# Altium PCB PCB.PcbDoc
Units mm, origin at the board's own origin, x right, y up, seen from the top; angles counter-clockwise.
Board outline 228 x 169 mm, 2 copper layers (Top Layer, Bottom Layer), stack 1.43 mm thick; 75 components, 61 nets, 402 pads, 19 vias.
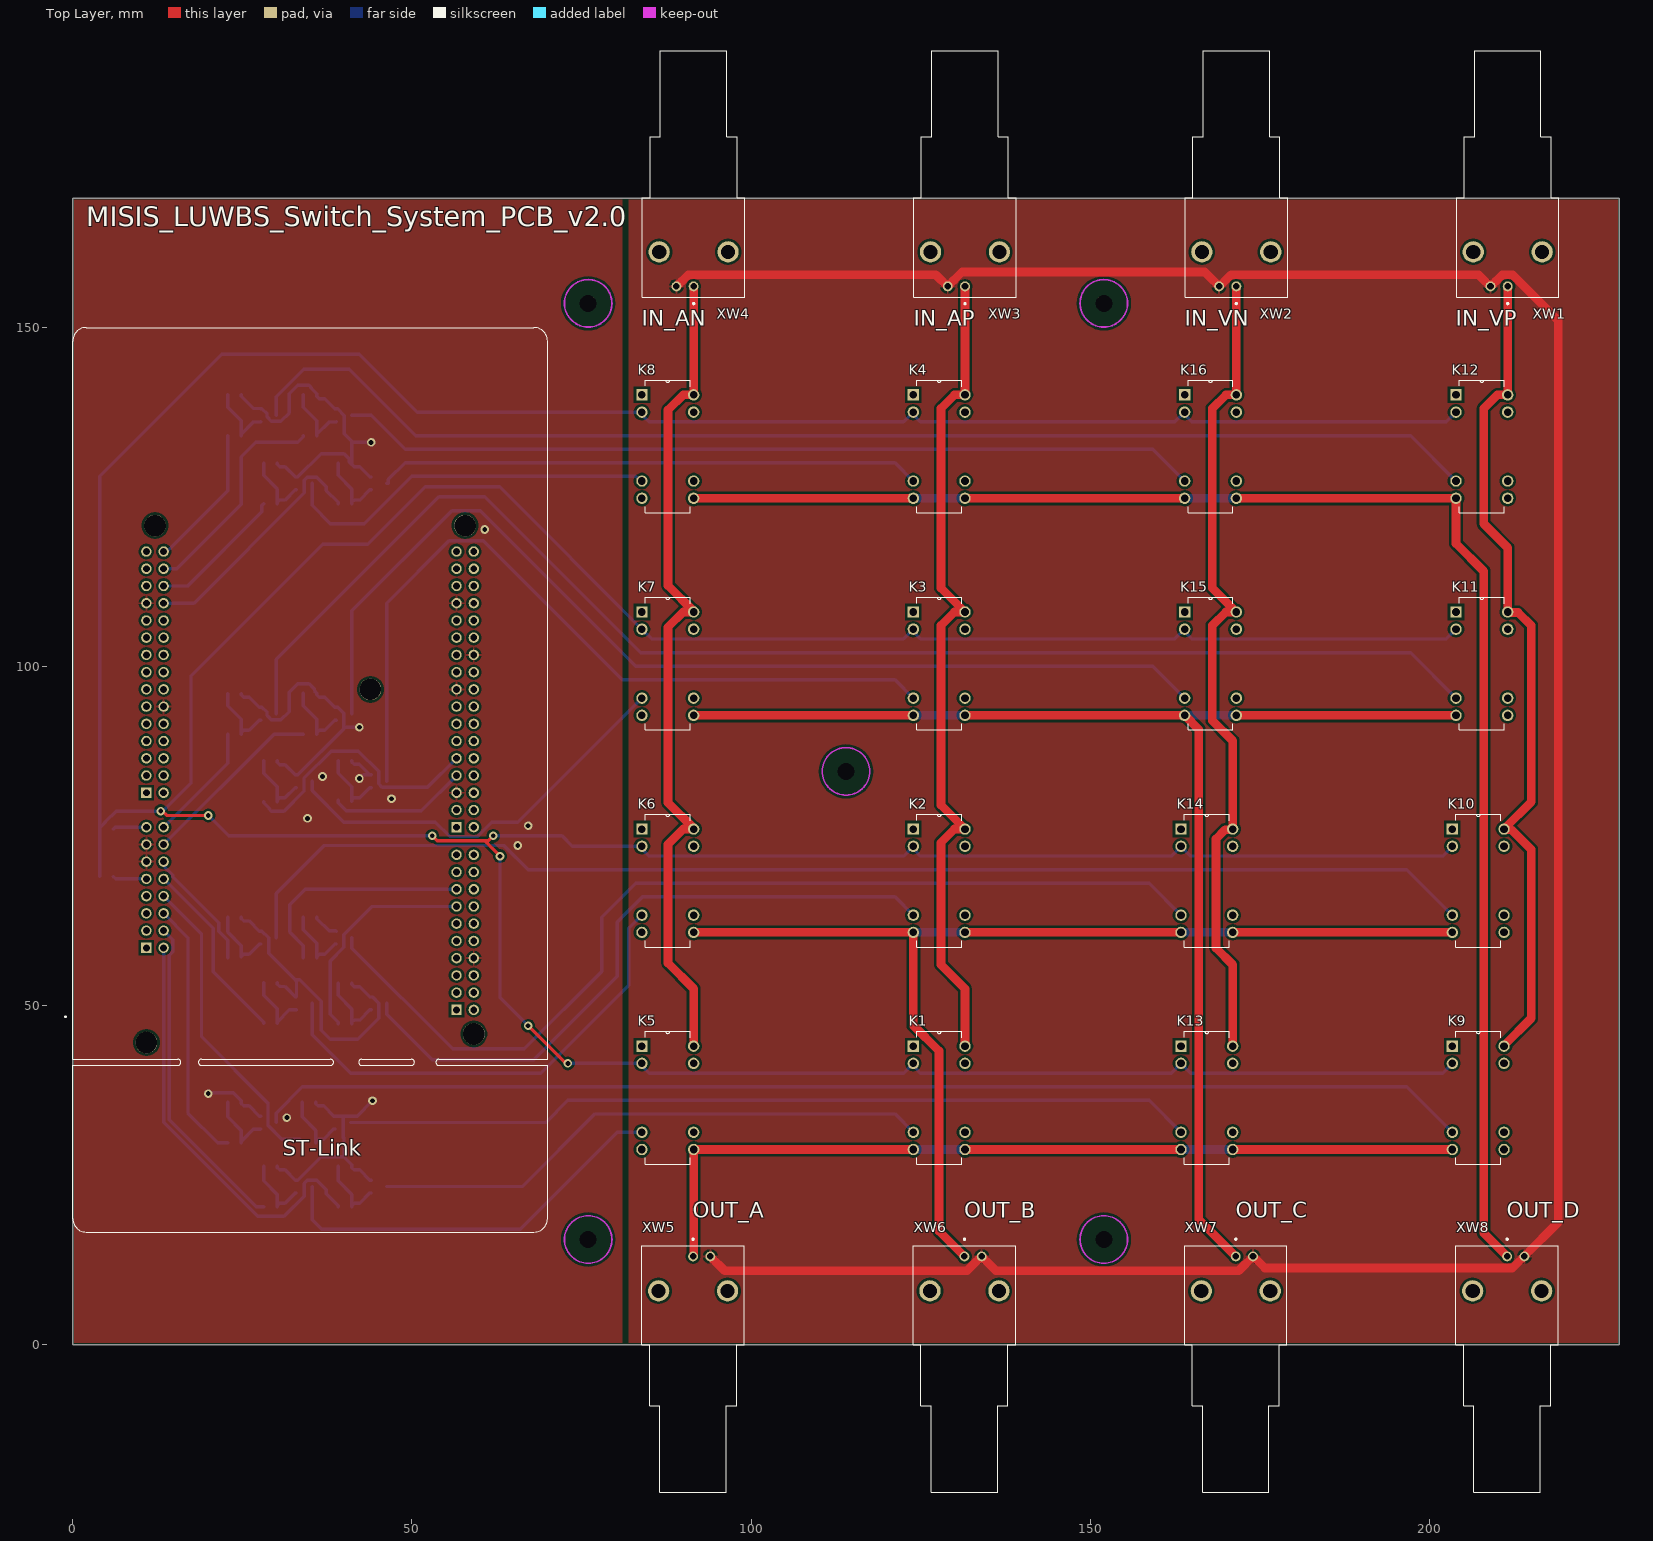
[diagram p0: Top Layer view]
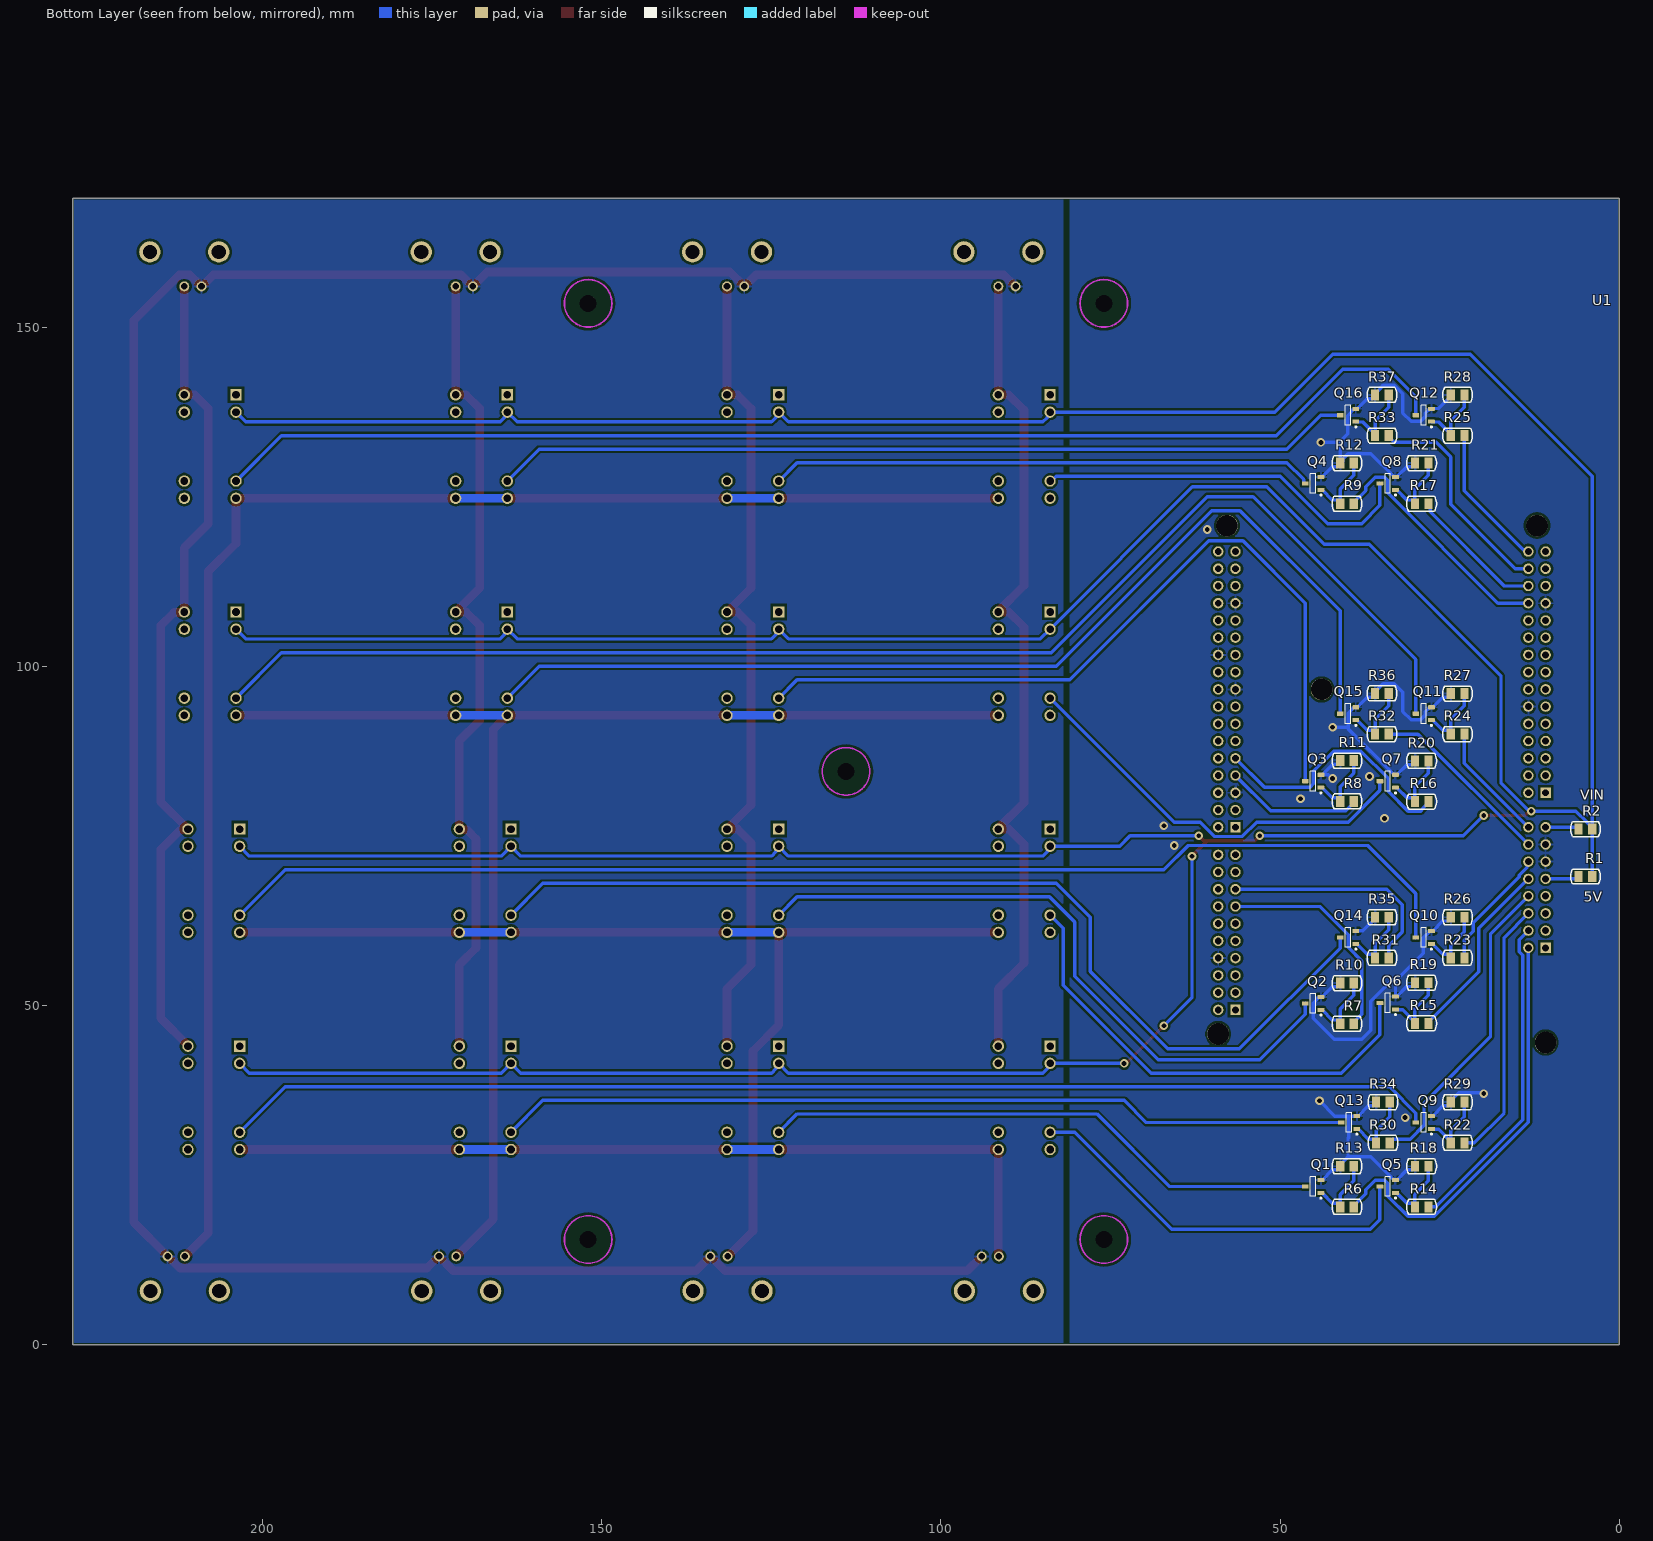
[diagram p1: Bottom Layer view, seen from below]
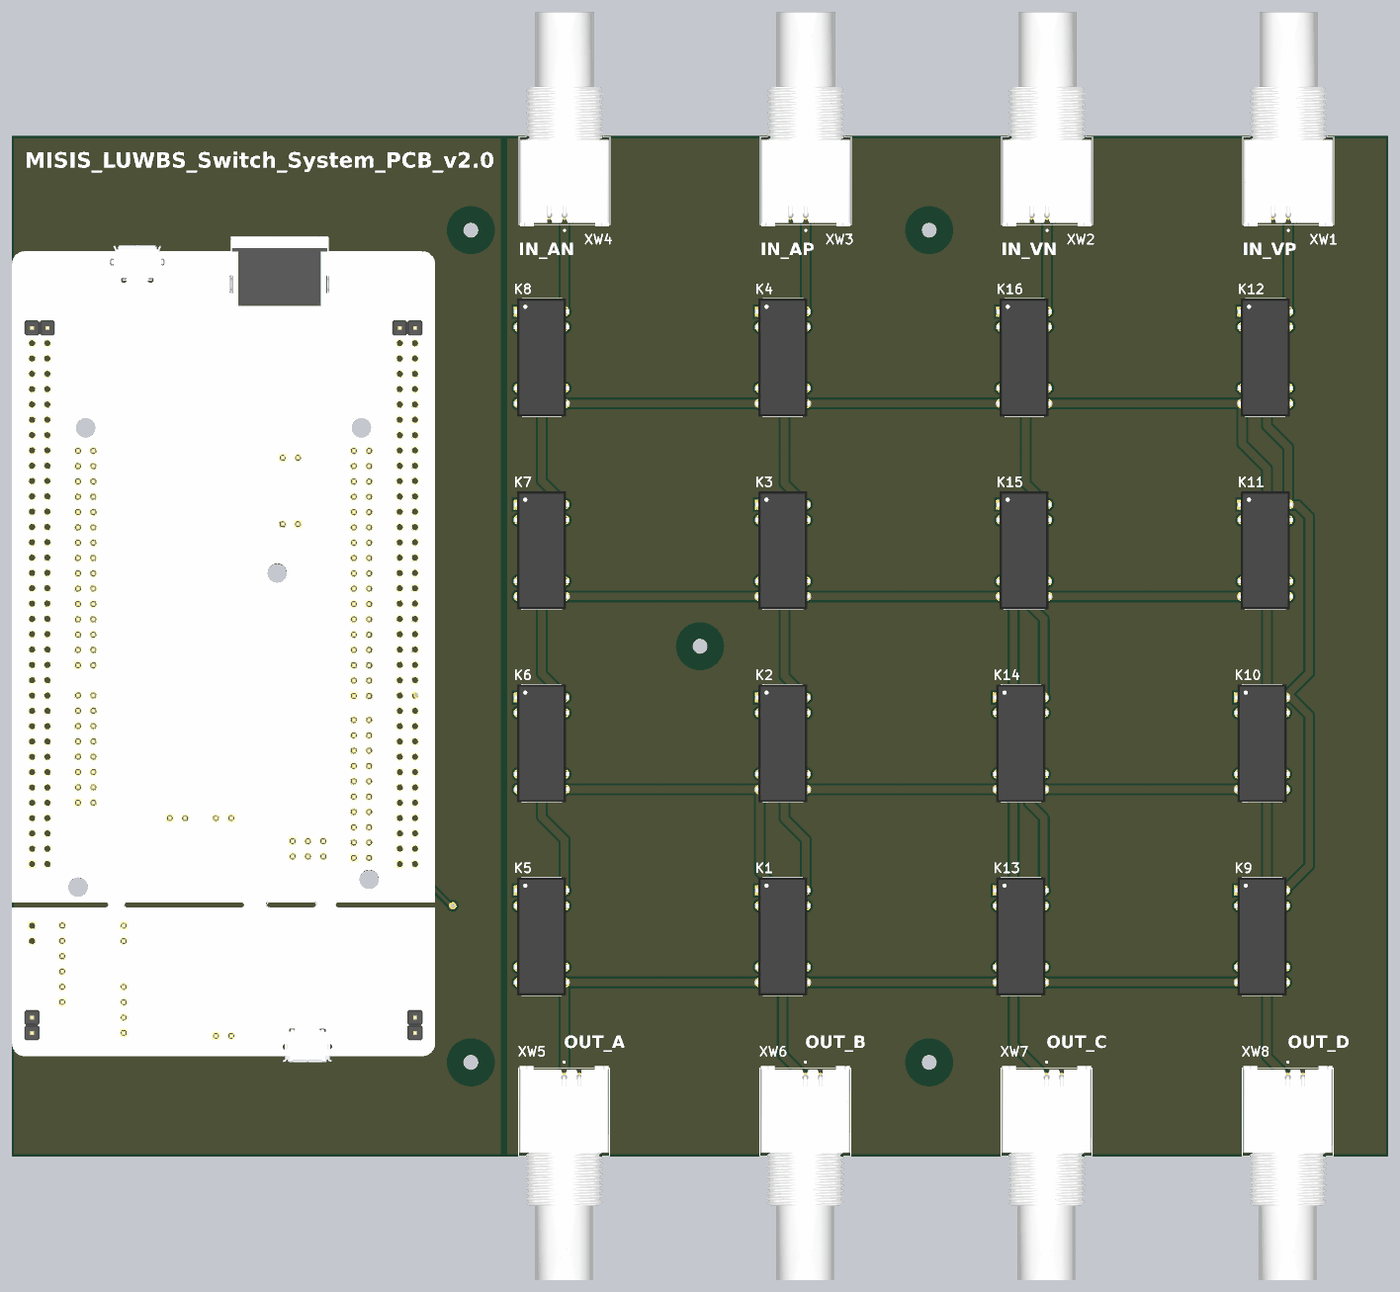
[diagram p2: 3D render of the assembled board from above, using the file's embedded part models]
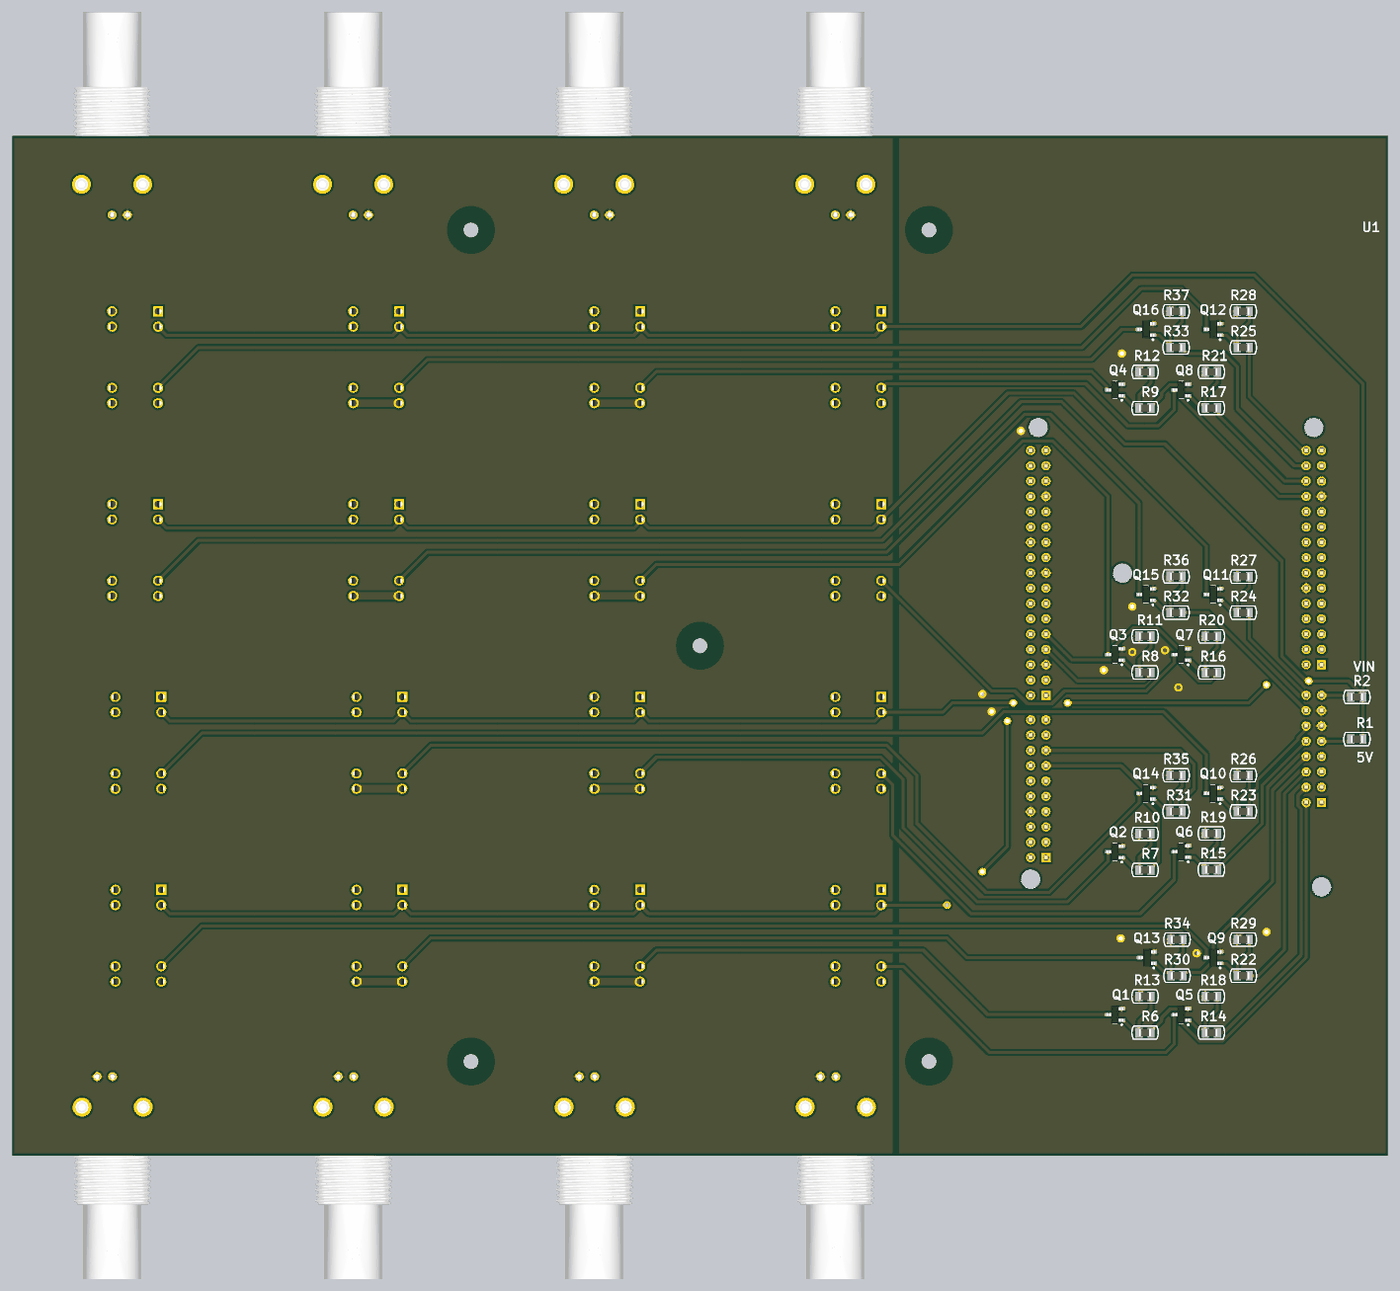
[diagram p3: 3D render of the assembled board from below, using the file's embedded part models]

## Layer stack, top to bottom
Top Solder: solder mask 0.0254, SM-001, Dk 4
Top Layer: signal copper 0.035
Dielectric 1: prepreg 0.115, FR4, Dk 4.2
Core: core 1.13, FR4, Dk 4.6
Dielectric 4: prepreg 0.115, FR4, Dk 4.2
Bottom Layer: signal copper 0.035
Bottom Solder: solder mask 0.0254, SM-001, Dk 4

## Board outline
0,0 0,169 228,169 228,0

## Design rules (kind name [scope] priority, off if disabled: settings)
AcuteAngle [All] p1: minimum=3.50000000000000E+0001 checktracksonly=FALSE
BoardOutlineClearance "BoardOutlineClearance 1" [All] p1: gap=0.25 ignorepadtopadclearanceinfootprint=FALSE except(0: Arc-SplitContinuation Track-SplitContinuation SMDPad-SplitContinuation THPad-SplitContinuation Via-SplitContinuation Fill-SplitContinuation Poly-SplitContinuation Region-SplitContinuation Text-SplitContinuation) // Milling
BoardOutlineClearance "BoardOutlineClearance 2" [All] p2: gap=0.4 ignorepadtopadclearanceinfootprint=FALSE except(0: Arc-SplitContinuation Track-SplitContinuation SMDPad-SplitContinuation THPad-SplitContinuation Via-SplitContinuation Fill-SplitContinuation Poly-SplitContinuation Region-SplitContinuation Text-SplitContinuation) // V-Cut
Clearance "Clearance 3 Oz" [All] p1: gap=0.35 ignorepadtopadclearanceinfootprint=FALSE except(0.25: Arc-Hole Track-Hole SMDPad-Hole THPad-Hole Via-Hole Fill-Hole Poly-Hole Region-Hole Text-Hole)
Clearance "Clearance 2 Oz" [All] p2: gap=0.3 ignorepadtopadclearanceinfootprint=FALSE except(0.25: Arc-Hole Track-Hole SMDPad-Hole THPad-Hole Via-Hole Fill-Hole Poly-Hole Region-Hole Text-Hole)
Clearance "Clearance-1 1 Oz" [All] p3: gap=0.2 ignorepadtopadclearanceinfootprint=FALSE except(0.25: Arc-Hole Track-Hole SMDPad-Hole THPad-Hole Via-Hole Fill-Hole Poly-Hole Region-Hole Text-Hole) // Standart
Clearance "Clearance-1 1/2 Oz" [All] p4: gap=0.125 ignorepadtopadclearanceinfootprint=FALSE except(0.2: Arc-Fill Arc-Poly Track-Fill Track-Poly SMDPad-SMDPad SMDPad-Fill SMDPad-Poly THPad-Fill THPad-Poly Via-Fill Via-Poly Fill-Fill Fill-Poly Poly-Poly Poly-Region Poly-Text; 0.25: Arc-Hole Track-Hole SMDPad-Hole THPad-Hole Via-Hole Fill-Hole Poly-Hole Region-Hole Text-Hole) // Standart
DiffPairsRouting "DiffPairsRouting 1 Oz" [All] p1: maxlimit=0.254 minlimit=0.2 mostfreqgap=0.254 toplayer_minwidth=0.2 toplayer_maxwidth=0.381 toplayer_prefwidth=0.381 bottomlayer_minwidth=0.2 bottomlayer_maxwidth=0.381 bottomlayer_prefwidth=0.381 maxuncoupledlength=12.7
DiffPairsRouting "DiffPairsRouting 1/2 Oz" [All] p2: maxlimit=0.254 minlimit=0.1 mostfreqgap=0.254 toplayer_minwidth=0.1 toplayer_maxwidth=0.381 toplayer_prefwidth=0.381 bottomlayer_minwidth=0.1 bottomlayer_maxwidth=0.381 bottomlayer_prefwidth=0.381 maxuncoupledlength=12.7
Height [All] p1: minheight=0 maxheight=35 prefheight=12.7
HoleSize "Minimum HoleSize" [IsPad] p1: absolutevalues=TRUE maxlimit=5.9 minlimit=0.6 maxpercent=80.000 minpercent=20.000
HoleSize "Minimum HoleSize VIA 1" [IsVia] p2: absolutevalues=TRUE maxlimit=5.9 minlimit=0.3 maxpercent=80.000 minpercent=20.000 // Standart
HoleSize "Minimum HoleSize VIA 2" [IsVia] p3: absolutevalues=TRUE maxlimit=5.9 minlimit=0.2 maxpercent=80.000 minpercent=20.000 // Advance
HoleToHoleClearance Hole2HoleClearance [All] p1: gap=0.25 allowstackedmicrovias=FALSE
MinimumAnnularRing "Minimum AR VIA Standart" [IsVia] p1: minimumring=0.15
MinimumAnnularRing "Minimum AR PAD Standart" [IsPAD] p2: minimumring=0.2
MinimumAnnularRing "Minimum AR VIA Advance" [IsVia] p3: minimumring=0.1
MinimumAnnularRing "Minimum AR PAD Advance" [IsPAD] p4: minimumring=0.15
MinimumSolderMaskSliver "SolderMask Bridge Standart" [All] p1: minsoldermaskwidth=0.15 // All Masks
MinimumSolderMaskSliver "SolderMask Bridge Advance" [All] p2: minsoldermaskwidth=0.1 // Mask LDI
PlaneClearance "PlaneClearance 3 Oz" [All] p1: clearance=0.35
PlaneClearance "PlaneClearance 2 Oz" [All] p2: clearance=0.3
PlaneClearance "PlaneClearance 1 Oz" [All] p3: clearance=0.2
PlaneClearance "PlaneClearance-1 1/2 Oz" [All] p4: clearance=0.2 // Standart
PlaneConnect "TermalConnect 3 Oz" [All] p1: planeconnectstyle=Relief reliefexpansion=0.2 reliefentries=4 reliefconductorwidth=0.35 reliefairgap=0.35 // Standart
PlaneConnect "TermalConnect 2 Oz" [All] p2: planeconnectstyle=Relief reliefexpansion=0.2 reliefentries=4 reliefconductorwidth=0.3 reliefairgap=0.3 // Standart
PlaneConnect "TermalConnect-1 1 Oz" [All] p3: planeconnectstyle=Relief reliefexpansion=0.2 reliefentries=4 reliefconductorwidth=0.2 reliefairgap=0.2 // Standart
PlaneConnect "TermalConnect-1 1/2 Oz" [All] p4: planeconnectstyle=Relief reliefexpansion=0.2 reliefentries=4 reliefconductorwidth=0.2 reliefairgap=0.2 // Standart
PolygonConnect "PolygonConnect 3 Oz" [All] p1: thpad.connectstyle=Relief thpad.reliefconductorwidth=0.35 thpad.reliefentries=4 thpad.polygonreliefangle="90 Angle" thpad.airgapwidth=0.35 smdpad.connectstyle=Relief smdpad.reliefconductorwidth=0.35 smdpad.reliefentries=4 smdpad.polygonreliefangle="90 Angle" smdpad.airgapwidth=0.35 via.connectstyle=Direct via.reliefconductorwidth=0.254 via.reliefentries=4 via.polygonreliefangle="90 Angle" via.airgapwidth=0.254
PolygonConnect "PolygonConnect 2 Oz" [All] p2: thpad.connectstyle=Relief thpad.reliefconductorwidth=0.3 thpad.reliefentries=4 thpad.polygonreliefangle="90 Angle" thpad.airgapwidth=0.3 smdpad.connectstyle=Relief smdpad.reliefconductorwidth=0.3 smdpad.reliefentries=4 smdpad.polygonreliefangle="90 Angle" smdpad.airgapwidth=0.3 via.connectstyle=Direct via.reliefconductorwidth=0.254 via.reliefentries=4 via.polygonreliefangle="90 Angle" via.airgapwidth=0.254
PolygonConnect "PolygonConnect-1 1 Oz" [All] p3: thpad.connectstyle=Relief thpad.reliefconductorwidth=0.2 thpad.reliefentries=4 thpad.polygonreliefangle="90 Angle" thpad.airgapwidth=0.2 smdpad.connectstyle=Relief smdpad.reliefconductorwidth=0.2 smdpad.reliefentries=4 smdpad.polygonreliefangle="90 Angle" smdpad.airgapwidth=0.2 via.connectstyle=Direct via.reliefconductorwidth=0.254 via.reliefentries=4 via.polygonreliefangle="90 Angle" via.airgapwidth=0.254 // Standart
PolygonConnect "PolygonConnect-1 1/2 Oz" [All] p4: thpad.connectstyle=Relief thpad.reliefconductorwidth=0.15 thpad.reliefentries=4 thpad.polygonreliefangle="90 Angle" thpad.airgapwidth=0.2 smdpad.connectstyle=Relief smdpad.reliefconductorwidth=0.2 smdpad.reliefentries=4 smdpad.polygonreliefangle="90 Angle" smdpad.airgapwidth=0.2 via.connectstyle=Direct via.reliefconductorwidth=0.254 via.reliefentries=4 via.polygonreliefangle="90 Angle" via.airgapwidth=0.254 // Standart
RoutingCorners [All] p1 off: cornerstyle=45-Degree minsetback=2.54 maxsetback=2.54
RoutingVias [All] p1: holewidth=0.3 width=0.6 viastyle="Through Hole" minholewidth=0.2 minwidth=0.4 maxholewidth=5.9 maxwidth=6.4
SilkToSilkClearance Silk2SilkClearance [All] p1 off: silktosilkclearance=0.15
SilkToSolderMaskClearance Silk2SolderMaskClearance [IsPad] p1 off: minsilkscreentomaskgap=0.15 clearancetoexposedcopper=TRUE
SolderMaskExpansion SolderMaskExpansion-1 [All] p1: expansion=0.05 istentingtop=FALSE // Standart
SolderMaskExpansion "SolderMaskExpansion LDI" [All] p2: expansion=0.025 istentingtop=FALSE // Advance
UnRoutedNet [All] p1: checkbadconnections=TRUE
Width "Width 3 Oz" [All] p1: maxlimit=10 minlimit=0.35 preferedwidth=0.4 checkconnectedcopper=TRUE
Width "Width 2 Oz" [All] p2: maxlimit=10 minlimit=0.3 preferedwidth=0.35 minimp=50.000000 maximp=50.000000 favimp=50.000000 checkconnectedcopper=TRUE
Width "Width 1 Oz" [All] p3: maxlimit=10 minlimit=0.15 preferedwidth=0.2 checkconnectedcopper=TRUE
Width "Width 1/2 Oz" [All] p4: maxlimit=10 minlimit=0.1 preferedwidth=0.125 checkconnectedcopper=TRUE
19 further rules are at their usual default settings.

## Classes and differential pairs
component class IN_V: K9 K10 K11 K12 K13 K14 K15 K16 Q9 Q10 Q11 Q12 Q13 Q14 Q15 Q16 R22 R23 R24 R25 R26 R27 R28 R29 R30 R31 R32 R33 R34 R35 R36 R37
component class IN_A: K1 K2 K3 K4 K5 K6 K7 K8 Q1 Q2 Q3 Q4 Q5 Q6 Q7 Q8 R6 R7 R8 R9 R10 R11 R12 R13 R14 R15 R16 R17 R18 R19 R20 R21
component class main: R1 R2 U1 XW1 XW2 XW3 XW4 XW5 XW6 XW7 XW8

## Components (designator, comment, footprint, x,y, rotation, side; value= is the part's Value field where it differs from the comment)
K1 "EDR201A0500" DIP14 131.54,28.76 r0 top locked
K2 "EDR201A0500" DIP14 131.54,60.76 r0 top locked
K3 "EDR201A0500" DIP14 131.54,92.76 r0 top locked
K4 "EDR201A0500" DIP14 131.54,124.76 r0 top locked
K5 "EDR201A0500" DIP14 91.54,28.76 r0 top locked
K6 "EDR201A0500" DIP14 91.54,60.76 r0 top locked
K7 "EDR201A0500" DIP14 91.54,92.76 r0 top locked
K8 "EDR201A0500" DIP14 91.54,124.76 r0 top locked
K9 "EDR201A0500" DIP14 211,28.76 r0 top locked
K10 "EDR201A0500" DIP14 211,60.76 r0 top locked
K11 "EDR201A0500" DIP14 211.54,92.76 r0 top locked
K12 "EDR201A0500" DIP14 211.54,124.76 r0 top locked
K13 "EDR201A0500" DIP14 171,28.76 r0 top locked
K14 "EDR201A0500" DIP14 171,60.76 r0 top locked
K15 "EDR201A0500" DIP14 171.54,92.76 r0 top locked
K16 "EDR201A0500" DIP14 171.54,124.76 r0 top locked
Q1 "IRLML2803TRPBF" SOT23-3 45.15,23.3 r0 bottom locked
Q2 "IRLML2803TRPBF" SOT23-3 45.15,50.296 r0 bottom locked
Q3 "IRLML2803TRPBF" SOT23-3 45.15,83.05 r0 bottom locked
Q4 "IRLML2803TRPBF" SOT23-3 45.15,126.95 r0 bottom locked
Q5 "IRLML2803TRPBF" SOT23-3 34.15,23.3 r0 bottom locked
Q6 "IRLML2803TRPBF" SOT23-3 34.15,50.346 r0 bottom locked
Q7 "IRLML2803TRPBF" SOT23-3 34.15,83.05 r0 bottom locked
Q8 "IRLML2803TRPBF" SOT23-3 34.15,126.95 r0 bottom locked
Q9 "IRLML2803TRPBF" SOT23-3 28.85,32.738 r0 bottom
Q10 "IRLML2803TRPBF" SOT23-3 28.85,60 r0 bottom locked
Q11 "IRLML2803TRPBF" SOT23-3 28.85,93 r0 bottom locked
Q12 "IRLML2803TRPBF" SOT23-3 28.85,137 r0 bottom locked
Q13 "IRLML2803TRPBF" SOT23-3 39.85,32.738 r0 bottom locked
Q14 "IRLML2803TRPBF" SOT23-3 40,60 r0 bottom locked
Q15 "IRLML2803TRPBF" SOT23-3 40,93 r0 bottom locked
Q16 "IRLML2803TRPBF" SOT23-3 40,137 r0 bottom locked
R1 "0 Ом" R0805 5,69 r180 bottom locked
R2 "0 Ом" R0805 5,76 r180 bottom locked
R6 "100 Ом" R0805 40.15,20.3 r180 bottom locked
R7 "100 Ом" R0805 40.15,47.296 r0 bottom locked
R8 "100 Ом" R0805 40.15,80.08 r0 bottom locked
R9 "100 Ом" R0805 40.15,123.95 r0 bottom locked
R10 "10 кОм" R0805 40.15,53.296 r180 bottom locked value="100 Ом"
R11 "10 кОм" R0805 40.15,86.08 r180 bottom locked value="100 Ом"
R12 "10 кОм" R0805 40.15,129.95 r180 bottom locked value="100 Ом"
R13 "10 кОм" R0805 40.15,26.3 r180 bottom locked value="100 Ом"
R14 "100 Ом" R0805 29.15,20.3 r180 bottom locked
R15 "100 Ом" R0805 29.15,47.346 r0 bottom locked
R16 "100 Ом" R0805 29.15,80.05 r0 bottom locked
R17 "100 Ом" R0805 29.15,123.95 r0 bottom locked
R18 "10 кОм" R0805 29.15,26.3 r180 bottom locked value="100 Ом"
R19 "10 кОм" R0805 29.15,53.346 r180 bottom locked value="100 Ом"
R20 "10 кОм" R0805 29.15,86.05 r180 bottom locked value="100 Ом"
R21 "10 кОм" R0805 29.15,129.95 r180 bottom locked value="100 Ом"
R22 "100 Ом" R0805 23.85,29.738 r180 bottom locked
R23 "100 Ом" R0805 23.85,57 r0 bottom locked
R24 "100 Ом" R0805 23.85,90 r0 bottom locked
R25 "100 Ом" R0805 23.85,134 r0 bottom locked
R26 "10 кОм" R0805 23.85,63 r180 bottom locked value="100 Ом"
R27 "10 кОм" R0805 23.85,95.97 r180 bottom locked value="100 Ом"
R28 "10 кОм" R0805 23.85,140 r180 bottom locked value="100 Ом"
R29 "10 кОм" R0805 23.85,35.738 r180 bottom locked value="100 Ом"
R30 "100 Ом" R0805 34.85,29.738 r180 bottom locked
R31 "100 Ом" R0805 35,57 r0 bottom locked
R32 "100 Ом" R0805 35,90 r0 bottom locked
R33 "100 Ом" R0805 35,134 r0 bottom locked
R34 "10 кОм" R0805 34.85,35.738 r180 bottom locked value="100 Ом"
R35 "10 кОм" R0805 35,63 r180 bottom locked value="100 Ом"
R36 "10 кОм" R0805 35,96 r180 bottom locked value="100 Ом"
R37 "10 кОм" R0805 35,140 r180 bottom locked value="100 Ом"
U1 "NUCLEO-F429ZI" MODULE_NUCLEO-F429ZI 35,83.26 r0 bottom locked
XW1 "BNC-JR" TE_227161-1 211.54,161.08 r180 top locked
XW2 "BNC-JR" TE_227161-1 171.54,161.08 r180 top locked
XW3 "BNC-JR" TE_227161-1 131.54,161.08 r180 top locked
XW4 "BNC-JR" TE_227161-1 91.54,161.08 r180 top locked
XW5 "BNC-JR" TE_227161-1 91.46,7.92 r0 top locked
XW6 "BNC-JR" TE_227161-1 131.46,7.92 r0 top locked
XW7 "BNC-JR" TE_227161-1 171.46,7.92 r0 top locked
XW8 "BNC-JR" TE_227161-1 211.46,7.92 r0 top locked

## Footprints (in the part's own frame and the unit in brackets; to place one, negate y for a bottom-side part, rotate by r counter-clockwise, add the part's x,y. Pads: shape width x height; smd on the part's side, far side on the other; paste and mask are expansions set on the pad)
DIP14 [mil] "8pin DIP14"
  rect 66x66 / inner round 66 / far side rect 66x66 hole 44: 1(-300,600)
  round 66 hole 44: 2(-300,500) 6(-300,100) 7(-300,0) 8(0,0) 9(0,100) 13(0,500) 14(0,600)
  silkscreen extent -280,-85 -20,685, body extent -333,-85 33,685, height 348
MODULE_NUCLEO-F429ZI [mm]
  rect 1.53x1.53 / inner round 1.53 / far side rect 1.53x1.53 hole 1.02: CN7_1(21.59,33.914) CN8_1(-24.13,24.77) CN9_1(-24.13,1.91) CN10_1(21.59,6.99)
  round 1.53 hole 1.02: CN7_2(24.13,33.914) CN7_3(21.59,31.374) CN7_4(24.13,31.374) CN7_5(21.59,28.834) CN7_6(24.13,28.834) CN7_7(21.59,26.294) CN7_8(24.13,26.294) CN7_9(21.59,23.754) CN7_10(24.13,23.754) CN7_11(21.59,21.214) CN7_12(24.13,21.214) CN7_13(21.59,18.674) CN7_14(24.13,18.674) CN7_15(21.59,16.134) CN7_16(24.13,16.134) CN7_17(21.59,13.594) CN7_18(24.13,13.594) CN7_19(21.59,11.054) CN7_20(24.13,11.054) CN8_2(-21.59,24.77) CN8_3(-24.13,22.23) CN8_4(-21.59,22.23) CN8_5(-24.13,19.69) CN8_6(-21.59,19.69) CN8_7(-24.13,17.15) CN8_8(-21.59,17.15) CN8_9(-24.13,14.61) CN8_10(-21.59,14.61) CN8_11(-24.13,12.07) CN8_12(-21.59,12.07) CN8_13(-24.13,9.53) CN8_14(-21.59,9.53) CN8_15(-24.13,6.99) CN8_16(-21.59,6.99) CN9_2(-21.59,1.91) CN9_3(-24.13,-0.63) CN9_4(-21.59,-0.63) CN9_5(-24.13,-3.17) CN9_6(-21.59,-3.17) CN9_7(-24.13,-5.71) CN9_8(-21.59,-5.71) CN9_9(-24.13,-8.25) CN9_10(-21.59,-8.25) CN9_11(-24.13,-10.79) CN9_12(-21.59,-10.79) CN9_13(-24.13,-13.33) CN9_14(-21.59,-13.33) CN9_15(-24.13,-15.87) CN9_16(-21.59,-15.87) CN9_17(-24.13,-18.41) CN9_18(-21.59,-18.41) CN9_19(-24.13,-20.95) CN9_20(-21.59,-20.95) CN9_21(-24.13,-23.49) CN9_22(-21.59,-23.49) CN9_23(-24.13,-26.03) CN9_24(-21.59,-26.03) CN9_25(-24.13,-28.57) CN9_26(-21.59,-28.57) CN9_27(-24.13,-31.11) CN9_28(-21.59,-31.11) CN9_29(-24.13,-33.65) CN9_30(-21.59,-33.65) CN10_2(24.13,6.99) CN10_3(21.59,4.45) CN10_4(24.13,4.45) CN10_5(21.59,1.91) CN10_6(24.13,1.91) CN10_7(21.59,-0.63) CN10_8(24.13,-0.63) CN10_9(21.59,-3.17) CN10_10(24.13,-3.17) CN10_11(21.59,-5.71) CN10_12(24.13,-5.71) CN10_13(21.59,-8.25) CN10_14(24.13,-8.25) CN10_15(21.59,-10.79) CN10_16(24.13,-10.79) CN10_17(21.59,-13.33) CN10_18(24.13,-13.33) CN10_19(21.59,-15.87) CN10_20(24.13,-15.87) CN10_21(21.59,-18.41) CN10_22(24.13,-18.41) CN10_23(21.59,-20.95) CN10_24(24.13,-20.95) CN10_25(21.59,-23.49) CN10_26(24.13,-23.49) CN10_27(21.59,-26.03) CN10_28(24.13,-26.03) CN10_29(21.59,-28.57) CN10_30(24.13,-28.57) CN10_31(21.59,-31.11) CN10_32(24.13,-31.11) CN10_33(21.59,-33.65) CN10_34(24.13,-33.65)
  round 3.2 hole 3.2 unplated: ""(-24.13,38.74) ""(-22.86,-37.46) ""(8.89,-13.33) ""(22.86,-37.46) ""(24.13,37.47)
  body extent -35,-69.27 35,67.72, height 1.46
R0805 [mm] "2012M"
  rect 1.2x1.6 smd: 1(-1,0) 2(1,0)
  silkscreen extent -2.2,-1.1 2.2,1.1, body extent -1,-0.6 1,0.6, height 0.5
SOT23-3 [mm] "SOT23, 3 pin"
  round 0.5 on Mech13: 0(0,0)
  rrect25% 1x0.6 smd: 1(-1.15,0.95) 2(-1.15,-0.95) 3(1.15,0)
  silkscreen extent -1.25,-1.45 0.38,1.81, body extent -1.4,-1.45 1.4,1.45, height 1.29
TE_227161-1 [mm]
  round 1.46 hole 0.97: 1(0,5.08) 2(2.54,5.08)
  round 3.14 hole 2.09: 3(-5.08,0) 4(5.08,0)
  silkscreen extent -7.54,-29.66 7.54,7.74, body extent -7.38,-28.58 7.38,6.98, height 16.13

## Part data
K1 K2 K3 K4 K5 K6 K7 K8 K9 K10 K11 K12 K13 K14 K15 K16: "Реле герконовое 5V / 1A,100V", Package="DIP-14 Fairchild Semiconductor", Check_prices=https://www.snapeda.com/parts/MM74HC32N/Fairchild+Imaging/view-part/?ref=eda, MF="Fairchild Semiconductor", MP=MM74HC32N, SnapEDA_Link=https://www.snapeda.com/parts/MM74HC32N/Fairchild+Imaging/view-part/?ref=snap
Q1 Q2 Q3 Q4 Q5 Q6 Q7 Q8 Q9 Q10 Q11 Q12 Q13 Q14 Q15 Q16: "N-MOSFET 30V 1.2A SOT23", Supplier Part Number 1=1173882, Supplier 1="Future Electronics"
R1 R2: library part R1_POSTOYANNYJ, "Резистор 0 Ом"
R6 R7 R8 R9 R10 R11 R12 R13 R14 R15 R16 R17 R18 R19 R20 R21 R22 R23 R24 R25 R26 R27 R28 R29 R30 R31 R32 R33 R34 R35 R36 R37: library part R1_POSTOYANNYJ, "Резистор 100 Ом"
U1: "STM32F429ZI, mbed-Enabled Development Nucleo-144 STM32F4 ARMÂ® CortexÂ®-M4 MCU 32-Bit Embedded Evaluation Board", Package=None, Check_prices=https://www.snapeda.com/parts/NUCLEO-F429ZI/STMicroelectronics/view-part/?ref=eda, MF=STMicroelectronics, MP=NUCLEO-F429ZI, SnapEDA_Link=https://www.snapeda.com/parts/NUCLEO-F429ZI/STMicroelectronics/view-part/?ref=snap
XW1 XW2 XW3 XW4 XW5 XW6 XW7 XW8: "Разъём высокочастотный RUICHI BNC-JR, гнездо на плату", Package=None, Supplier Part Number 1=900-0731713061-ND, Availability=Unavailable, MP=227161-1, Price=None, Supplier 1=DigiKey

## Free pads (board coordinates)
  round 2.3 hole 2.5 unplated: MTH1(76,15.5) MTH1(76,153.5) MTH1(114,84.5) MTH6(152,15.5) MTH6(152,153.5)

## Via types
v1: diameter 1.27, hole 0.711, Top Layer to Bottom Layer, 18 vias
v2: diameter 1.27/1.27 (per signal layer), hole 0.711, Top Layer to Bottom Layer, 1 vias

## Nets (pads, with @x,y where several pads share a name; then routed paths per layer and width w, separated by ;. In a path a pad name is that pad's centre, name@x,y a point inside that pad or via, vN(x,y) a via of type N, cw(c..) or ccw(c..) an arc to the next point about the centre after c; other vN are vias at no path point)
5V: R1.1 U1.CN8_9 | length 5
  Bottom Layer w0.5: R1.1 6.35,68.65 U1.CN8_9
BNC_A_GND: XW1.2 XW2.2 XW3.2 XW4.2 XW5.2 XW6.2 XW7.2 XW8.2 | length 403
  Top Layer w1.27: XW4.2 89.051,156 90.766,157.715 127.234,157.715 128.949,156 XW3.2 131.11,158.11 166.89,158.11 XW2.2 169.051,156 170.766,157.715 207.234,157.715 208.949,156 XW1.2 209.051,156 210.766,157.715 212.25,157.715 219,150.965 219,18.051 214,13.051 XW8.2 213.949,13 212.234,11.285 175.766,11.285 174.051,13 XW7.2 171.89,10.89 136.11,10.89 XW6.2 133.949,13 131.839,10.89 96.11,10.89 XW5.2
GND: Q1.2 Q2.2 Q3.2 Q4.2 Q5.2 Q6.2 Q7.2 Q8.2 Q9.2 Q10.2 Q11.2 Q12.2 Q13.2 Q14.2 Q15.2 Q16.2 R10.1 R11.1 R12.1 R13.1 R18.1 R19.1 R20.1 R21.1 R26.1 R27.1 R28.1 R29.1 R34.1 R35.1 R36.1 R37.1 U1.CN7_8 U1.CN8_11 U1.CN8_13 U1.CN9_12 U1.CN9_23 U1.CN10_5 U1.CN10_17 U1.CN10_22 U1.CN10_27 | length 192.6
  Bottom Layer w0.5: v1(20,37) 20.138,37.138 23.699,37.138 24.052,36.785 24.052,36.736 24.85,35.938 R29.1 24.85,35.538 25.2,35.188 26,35.188 27.5,33.688 Q9.2 ; R26.1 24.85,62.8 25.2,62.45 26,62.45 27.5,60.95 Q10.2 27.9,60.95 28.9,59.95 28.9,57.698 32.8,53.798 ; R27.1 24.85,95.77 25.2,95.42 26.03,95.42 27.5,93.95 Q11.2 27.9,93.95 28.657,93.193 28.657,92.738 29.295,92.1 30.705,92.1 31.928,93.323 31.928,96.177 33.151,97.4 34.849,97.4 35.65,96.599 35.65,96.35 R36.1 36,95.8 36.35,95.45 37.15,95.45 38.65,93.95 Q15.2 39.05,93.95 39.95,93.05 39.95,91 ; R28.1 24.85,139.8 26.65,138 27.65,138 Q12.2 27.9,137.95 28.657,137.193 28.657,136.738 29.295,136.1 30.705,136.1 31.928,137.323 31.928,140.177 33.151,141.4 34.849,141.4 35.2,141.049 35.2,141 36,140.2 R37.1 36,139.8 36.35,139.45 37.15,139.45 38.65,137.95 Q16.2 39.05,137.95 40.05,136.95 40.05,134.275 41.15,133.175 ; R18.1 30.15,26.1 30.5,25.75 31.3,25.75 32.8,24.25 Q5.2 33.2,24.25 36.65,27.7 39.999,27.7 ; R19.1 30.15,53.146 30.5,52.796 31.3,52.796 32.8,51.296 Q6.2 33,53.598 32.8,53.798 ; R20.1 30.15,85.85 30.5,85.5 31.3,85.5 32.8,84 Q7.2 33.2,84 39.95,90.75 39.95,91 ; R21.1 30.15,129.75 30.5,129.4 31.3,129.4 32.8,127.9 Q8.2 33.2,127.9 36.65,131.35 39.999,131.35 40.8,130.549 40.8,130.1 41.5,129.4 42.3,129.4 43.8,127.9 Q4.2 ; R34.1 35.85,35.538 36.2,35.188 37,35.188 38.5,33.688 Q13.2 39.95,33.688 ; R35.1 36,62.8 37.8,61 38.8,61 Q14.2 ; R10.1 41.15,53.096 41.5,52.746 42.3,52.746 43.8,51.246 Q2.2 44.2,51.246 45.1,50.346 45.1,48.1 42,45 38,45 36.65,46.35 36.65,50.601 33.453,53.798 32.8,53.798 ; R11.1 41.15,85.88 41.5,85.53 42.27,85.53 Q3.2@43.8,84 ; R12.1 41.15,133.175 ; v1(42.27,83.455) 42.373,83.455 42.919,84 Q3.2@43.8,84 ; v1(42.27,91) 39.95,91 ; Q1.2 43.8,24.25 42.3,25.75 41.5,25.75 41.15,26.1 R13.1 41.15,26.5 40.35,27.3 40.35,27.349 39.999,27.7 ; Q3.2 Q3.2@43.8,84 ; v1(44,133) 41.325,133 41.15,133.175 ; v1(44.197,35.938) 41.947,33.688 39.95,33.688 ; 39.95,33.688 39.9,33.638 39.9,30.521 39.999,30.422 39.999,27.7
  other v1: 31.587,33.463 65.62,73.571 67.144,76.482 34.612,77.565 47,80.458 36.837,83.743 60.75,120.151
IN_AN: K5.14 K6.14 K7.14 K8.14 XW4.1 | length 124.1
  Top Layer w1.27: K5.14 91.54,52.46 87.766,56.234 87.766,73.766 90,76 K6.14 91.54,76.11 87.766,79.884 87.766,105.766 90,108 K7.14 91.54,108.11 87.766,111.884 87.766,137.766 90,140 K8.14 XW4.1
IN_AP: K1.14 K2.14 K3.14 K4.14 XW3.1 | length 123.5
  Top Layer w1.27: K1.14 131.54,52.46 128,56 128,74 130,76 K2.14 128,79.54 128,106 130,108 K3.14 128,111.54 128,138 130,140 K4.14 XW3.1
IN_VN: K13.14 K14.14 K15.14 K16.14 XW2.1 | length 122.1
  Top Layer w1.27: K13.14 171,56 168.546,58.454 168.546,74.546 169.922,75.922 170.922,75.922 K14.14 171,89 168,92 168,106 170,108 K15.14 168,111.54 168,138 170,140 K16.14 XW2.1
IN_VP: K9.14 K10.14 K11.14 K12.14 XW1.1 | length 123.7
  Top Layer w1.27: K9.14 211,44.11 215,48.11 215,73 212.078,75.922 211.078,75.922 K10.14 215,80 215,106 213.078,107.922 211.618,107.922 K11.14 211.54,117.46 208,121 208,138 210,140 K12.14 XW1.1
NetK1_6: K1.6 Q1.3 | length 83.2
  Bottom Layer w0.5: Q1.3 66.3,23.3 77,34 121.22,34 K1.6
NetK2_6: K2.6 Q2.3 | length 97.7
  Bottom Layer w0.5: Q2.3 46.3,48.7 53,42 68,42 80.3,54.3 80.3,62.3 84,66 121.22,66 K2.6
NetK3_6: K3.6 Q3.3 | length 117.3
  Bottom Layer w0.5: Q3.3 46.3,109.3 55.48,118.48 60.52,118.48 81,98 121.22,98 K3.6
NetK4_6: K4.6 Q4.3 | length 80.3
  Bottom Layer w0.5: Q4.3 46.483,126.95 46.533,127 46.533,127.533 49,130 121.22,130 K4.6
NetK5_6: K5.6 Q5.3 | length 60
  Bottom Layer w0.5: Q5.3 35.3,18.4 36.7,17 66,17 80.3,31.3 K5.6
NetK6_6: K6.6 Q6.3 | length 70.2
  Bottom Layer w0.5: Q6.3 35.3,45.7 41,40 69,40 82,53 82,61.38 K6.6
NetK7_6: K7.6 Q7.3 | length 61.2
  Bottom Layer w0.5: Q7.3 35.3,81.681 39.981,77 53.481,77 55.576,74.905 59.695,74.905 61.79,77 65.62,77 K7.6
NetK8_6: K8.6 Q8.3 | length 56.2
  Bottom Layer w0.5: Q8.3 35.3,123.7 38,121 43,121 50,128 83.039,128 83.739,127.3 K8.6
NetK9_6: K9.6 Q9.3 | length 179.2
  Bottom Layer w0.5: Q9.3 30,34.137 33.863,38 196.68,38 K9.6
NetK10_6: K10.6 Q10.3 | length 187.1
  Bottom Layer w0.5: Q10.3 30,66.5 37.071,73.571 63.573,73.571 67.144,70 196.68,70 K10.6
NetK11_6: K11.6 Q11.3 | length 204.2
  Bottom Layer w0.5: Q11.3 30,101 54,125 60.75,125 83.75,102 197.22,102 K11.6
NetK12_6: K12.6 Q12.3 | length 185.1
  Bottom Layer w0.5: Q12.3 30,139.7 34.093,143.793 40.785,143.793 50.578,134 197.22,134 K12.6
NetK13_6: K13.6 Q13.3 | length 125.7
  Bottom Layer w0.5: Q13.3 69.738,32.738 73,36 158.68,36 K13.6
NetK14_6: K14.6 Q14.3 | length 146.7
  Bottom Layer w0.5: Q14.3 41.15,58.44 56,43.59 66.59,43.59 78,55 78,63 83,68 158.68,68 K14.6
NetK15_6: K15.6 Q15.3 | length 155.5
  Bottom Layer w0.5: Q15.3 41.15,108.15 55.92,122.92 60.08,122.92 83,100 159.22,100 K15.6
NetK16_6: K16.6 Q16.3 | length 126.8
  Bottom Layer w0.5: Q16.3 44,137 49,132 159.22,132 K16.6
NetQ1_1: Q1.1 R6.1 R13.2 | length 10.4
  Bottom Layer w0.5: R13.2 39.15,24.125 41.15,22.125 R6.1@41.15,20.5 ; R6.1 R6.1@41.15,20.5 ; Q1.1 43.8,22.35 42.3,20.85 41.5,20.85 R6.1@41.15,20.5
NetQ2_1: Q2.1 R7.2 R10.2 | length 10.4
  Bottom Layer w0.5: R10.2 39.15,51.471 41.15,49.471 R7.2@41.15,47.496 ; R7.2 R7.2@41.15,47.496 ; Q2.1 43.8,49.346 42.3,47.846 41.5,47.846 R7.2@41.15,47.496
NetQ3_1: Q3.1 R8.2 R11.2 | length 10.4
  Bottom Layer w0.5: R11.2 39.15,84.255 41.15,82.255 R8.2@41.15,80.28 ; R8.2 R8.2@41.15,80.28 ; Q3.1 43.8,82.1 42.33,80.63 41.5,80.63 R8.2@41.15,80.28
NetQ4_1: Q4.1 R9.2 R12.2 | length 10.4
  Bottom Layer w0.5: R12.2 39.15,128.125 41.15,126.125 R9.2@41.15,124.15 ; R9.2 R9.2@41.15,124.15 ; Q4.1 43.8,126 42.3,124.5 41.5,124.5 R9.2@41.15,124.15
NetQ5_1: Q5.1 R14.1 R18.2 | length 10.4
  Bottom Layer w0.5: R18.2 28.15,24.125 30.15,22.125 R14.1@30.15,20.5 ; R14.1 R14.1@30.15,20.5 ; Q5.1 32.8,22.35 31.3,20.85 30.5,20.85 R14.1@30.15,20.5
NetQ6_1: Q6.1 R15.2 R19.2 | length 10.4
  Bottom Layer w0.5: R19.2 28.15,51.521 30.15,49.521 R15.2@30.15,47.546 ; R15.2 R15.2@30.15,47.546 ; Q6.1 32.95,49.346 31.95,49.346 R15.2@30.15,47.546
NetQ7_1: Q7.1 R16.2 R20.2 | length 10.4
  Bottom Layer w0.5: R20.2 28.15,84.225 30.15,82.225 R16.2@30.15,80.25 ; R16.2 R16.2@30.15,80.25 ; Q7.1 32.8,82.1 31.3,80.6 30.5,80.6 R16.2@30.15,80.25
NetQ8_1: Q8.1 R17.2 R21.2 | length 10.4
  Bottom Layer w0.5: R21.2 28.15,128.125 30.15,126.125 R17.2@30.15,124.15 ; R17.2 R17.2@30.15,124.15 ; Q8.1 32.8,126 31.3,124.5 30.5,124.5 R17.2@30.15,124.15
NetQ9_1: Q9.1 R22.1 R29.2 | length 10.4
  Bottom Layer w0.5: R29.2 22.85,33.563 24.85,31.563 R22.1@24.85,29.938 ; R22.1 R22.1@24.85,29.938 ; Q9.1 27.65,31.738 26.65,31.738 R22.1@24.85,29.938
NetQ10_1: Q10.1 R23.2 R26.2 | length 10.2
  Bottom Layer w0.5: R26.2 22.85,60.825 24.85,58.825 24.85,57.2 25.2,57.55 26,57.55 27.5,59.05 Q10.1
NetQ11_1: Q11.1 R24.2 R27.2 | length 10.4
  Bottom Layer w0.5: R27.2 22.85,94.16 24.85,92.16 R24.2@24.85,90.2 ; R24.2 R24.2@24.85,90.2 ; Q11.1 27.5,92.05 26,90.55 25.2,90.55 R24.2@24.85,90.2
NetQ12_1: Q12.1 R25.2 R28.2 | length 10.4
  Bottom Layer w0.5: R28.2 22.85,138.175 24.85,136.175 R25.2@24.85,134.2 ; R25.2 R25.2@24.85,134.2 ; Q12.1 27.65,136 26.65,136 R25.2@24.85,134.2
NetQ13_1: Q13.1 R30.1 R34.2 | length 10.4
  Bottom Layer w0.5: R34.2 33.85,33.563 35.85,31.563 R30.1@35.85,29.938 ; R30.1 R30.1@35.85,29.938 ; Q13.1 38.5,31.788 37,30.288 36.2,30.288 R30.1@35.85,29.938
NetQ14_1: Q14.1 R31.2 R35.2 | length 10.4
  Bottom Layer w0.5: R35.2 34,61.175 36,59.175 R31.2@36,57.2 ; R31.2 R31.2@36,57.2 ; Q14.1 38.65,59.05 37.15,57.55 36.35,57.55 R31.2@36,57.2
NetQ15_1: Q15.1 R32.2 R36.2 | length 10.4
  Bottom Layer w0.5: R36.2 34,94.175 36,92.175 R32.2@36,90.2 ; R32.2 R32.2@36,90.2 ; Q15.1 38.65,92.05 37.15,90.55 36.35,90.55 R32.2@36,90.2
NetQ16_1: Q16.1 R33.2 R37.2 | length 10.4
  Bottom Layer w0.5: R37.2 34,138.175 36,136.175 R33.2@36,134.2 ; R33.2 R33.2@36,134.2 ; Q16.1 38.8,136 37.8,136 R33.2@36,134.2
OUT_A: K1.7 K1.8 K5.8 K9.7 K13.7 K13.8 XW5.1 | length 127.6
  Top Layer w1.27: XW5.1 91.46,13.051 91.54,13.131 K5.8 K1.7 ; K1.8 K13.7 ; K13.8 K9.7
  Bottom Layer w1.27: K1.7 K1.8 ; K13.7 K13.8
OUT_B: K2.7 K2.8 K6.8 K10.7 K14.7 K14.8 XW6.1 | length 162.7
  Top Layer w1.27: K6.8 K2.7 123.92,47.069 127.711,43.279 127.711,16.749 XW6.1 ; K2.8 K14.7 ; K14.8 K10.7
  Bottom Layer w1.27: K2.7 K2.8 ; K14.7 K14.8
OUT_C: K3.7 K3.8 K7.8 K11.7 K15.7 K15.8 XW7.1 | length 195.3
  Top Layer w1.27: K7.8 K3.7 ; K3.8 K15.7 166,90.68 166,18.46 XW7.1 ; K15.8 K11.7
  Bottom Layer w1.27: K3.7 K3.8 ; K15.7 K15.8
OUT_D: K4.7 K4.8 K8.8 K12.7 K16.7 K16.8 XW8.1 | length 227.3
  Top Layer w1.27: K8.8 K4.7 ; K4.8 K16.7 ; K16.8 K12.7 203.92,118.08 208,114 208,16.46 XW8.1
  Bottom Layer w1.27: K4.7 K4.8 ; K16.7 K16.8
PWR: K1.2 K2.2 K3.2 K4.2 K5.2 K6.2 K7.2 K8.2 K9.2 K10.2 K11.2 K12.2 K13.2 K14.2 K15.2 K16.2 R1.2 R2.2 | length 886.5
  Top Layer w0.5: v1(13,78.65) 13.208,78.65 13.858,78 v1(20,78) ; v1(53,75) 53.749,74.251 60.749,74.251 ; v2(62,75) 61.251,74.251 60.749,74.251 ; v1(63,72) 60.749,74.251 ; v1(67.144,47) 72.536,41.607 72.853,41.607 v1(73,41.46)
  Bottom Layer w0.5: R1.2 R2.2 R2.2@4,76.2 ; v1(20,78) 23,75 v1(53,75) ; v2(62,75) 72.135,75 73.675,73.46 K6.2 83.92,73.142 84.353,72.709 84.353,72.647 84.978,72.022 122.482,72.022 K2.2 123.92,73.142 124.353,72.709 124.353,72.647 124.978,72.022 161.942,72.022 K14.2 164.818,72.022 201.942,72.022 K10.2 ; v1(63,72) 63,51.144 v1(67.144,47) ; v1(73,41.46) K5.2 83.92,41.142 84.353,40.709 84.353,40.647 84.978,40.022 122.482,40.022 K1.2 123.92,41.142 124.353,40.709 124.353,40.647 124.978,40.022 161.942,40.022 K13.2 164.818,40.022 201.942,40.022 K9.2 ; K11.2 202.482,104.022 164.978,104.022 164.353,104.647 164.353,104.709 163.92,105.142 K15.2 162.482,104.022 124.978,104.022 124.353,104.647 124.353,104.709 123.92,105.142 K3.2 122.482,104.022 85.358,104.022 K7.2 62.928,126.452 51.972,126.452 43.52,118 36.87,118 17.454,98.584 17.454,82.804 13.3,78.65 v1(13,78.65) 6.401,78.65 4.798,77.046 4.798,76.998 R2.2@4,76.2 ; K12.2 202.482,136.022 164.978,136.022 164.353,136.647 164.353,136.709 163.92,137.142 K16.2 162.482,136.022 124.978,136.022 124.353,136.647 124.353,136.709 123.92,137.142 K4.2 122.482,136.022 84.978,136.022 84.353,136.647 84.353,136.709 83.92,137.142 K8.2 50.789,137.46 42.249,146 22,146 4,128 R2.2@4,76.2
R_A_AN: R14.2 U1.CN8_4 | length 47.9
  Bottom Layer w0.5: U1.CN8_4 14.775,59.665 14.775,57.925 14.26,57.41 14.26,33.156 27.093,20.323 28.127,20.323 R14.2
R_A_AP: R6.2 U1.CN8_2 | length 62.5
  Bottom Layer w0.5: U1.CN8_2 13.41,32.791 27.301,18.9 31.155,18.9 34.15,21.895 34.15,23.755 34.595,24.2 36.005,24.2 37.402,22.802 37.402,22.248 39.15,20.5 R6.2
R_A_VN: R30.2 U1.CN8_8 | length 46.4
  Bottom Layer w0.5: U1.CN8_8 19,60.52 19,45.399 28.8,35.599 28.8,32.334 30.845,30.288 33.5,30.288 33.85,29.938 R30.2
R_A_VP: R22.2 U1.CN8_6 | length 38.6
  Bottom Layer w0.5: U1.CN8_6 17,59.98 17,34.137 21.399,29.738 R22.2
R_B_AN: R15.1 U1.CN8_10 | length 27.4
  Bottom Layer w0.5: U1.CN8_10 20.704,61.356 20.704,54.992 28.15,47.546 R15.1
R_B_AP: R7.1 U1.CN7_13 | length 32.8
  Bottom Layer w0.5: R7.1 39.15,47.496 37.95,48.696 37.95,56.545 39.95,58.545 39.95,60.405 44.131,64.586 U1.CN7_13
R_B_VN: R31.1 U1.CN7_15 | length 34.2
  Bottom Layer w0.5: R31.1 34,58.825 32,60.825 32,64.85 34.276,67.126 U1.CN7_15
R_B_VP: R23.1 U1.CN8_12 | length 18.1
  Bottom Layer w0.5: U1.CN8_12 13.607,70.993 13.607,70.371 13.963,70.015 13.975,70.015 14.775,69.215 14.775,68.942 21.554,62.163 21.554,60.919 22.85,59.623 R23.1
R_C_AN: R16.1 U1.CN10_9 | length 39
  Bottom Layer w0.5: R16.1 28.15,79.85 28.948,79.052 28.948,79.004 29.301,78.65 31.155,78.65 34.1,81.595 34.1,83.455 38.125,87.48 42.125,87.48 45.1,84.505 45.1,82.645 45.595,82.15 52.31,82.15 U1.CN10_9
R_C_AP: R8.1 U1.CN10_7 | length 20.5
  Bottom Layer w0.5: R8.1@39.15,80.28 R8.1 39.15,79.88 39.948,79.082 39.948,79.034 40.301,78.68 51.38,78.68 U1.CN10_7
R_C_VN: R32.1 U1.CN8_14 | length 27.3
  Bottom Layer w0.5: U1.CN8_14 29.68,90 R32.1
R_C_VP: R24.1 U1.CN8_16 | length 17.6
  Bottom Layer w0.5: U1.CN8_16 22.85,85.71 R24.1
R_D_AN: R17.1 U1.CN9_26 | length 20.3
  Bottom Layer w0.5: U1.CN9_26 16.98,111.83 27.895,122.745 27.895,123.695 R17.1
R_D_AP: R9.1 U1.CN9_24 | length 36.6
  Bottom Layer w0.5: U1.CN9_24 17.895,109.29 34.15,125.545 34.15,127.405 34.595,127.85 36.005,127.85 37.402,126.452 37.402,125.898 39.15,124.15 R9.1
R_D_VN: R33.1 U1.CN9_28 | length 32.9
  Bottom Layer w0.5: U1.CN9_28 15.37,114.37 24.85,123.85 24.85,130.85 27,133 33.2,133 34,133.8 R33.1
R_D_VP: R25.1 U1.CN9_30 | length 21.3
  Bottom Layer w0.5: U1.CN9_30 13.607,117.107 14.107,117.107 22.85,125.85 R25.1
VIN: R2.1 U1.CN8_15 | length 5
  Bottom Layer w0.5: R2.1 6.27,76.27 U1.CN8_15
pads on no net: K1.1 K1.9 K1.13 K2.1 K2.9 K2.13 K3.1 K3.9 K3.13 K4.1 K4.9 K4.13 K5.1 K5.7 K5.9 K5.13 K6.1 K6.7 K6.9 K6.13 K7.1 K7.7 K7.9 K7.13 K8.1 K8.7 K8.9 K8.13 K9.1 K9.8 K9.9 K9.13 K10.1 K10.8 K10.9 K10.13 K11.1 K11.8 K11.9 K11.13 K12.1 K12.8 K12.9 K12.13 K13.1 K13.9 K13.13 K14.1 K14.9 K14.13 K15.1 K15.9 K15.13 K16.1 K16.9 K16.13 Q1.0 Q2.0 Q3.0 Q4.0 Q5.0 Q6.0 Q7.0 Q8.0 Q9.0 Q10.0 Q11.0 Q12.0 Q13.0 Q14.0 Q15.0 Q16.0 U1. U1.CN7_1 U1.CN7_2 U1.CN7_3 U1.CN7_4 U1.CN7_5 U1.CN7_6 U1.CN7_7 U1.CN7_9 U1.CN7_10 U1.CN7_11 U1.CN7_12 U1.CN7_14 U1.CN7_16 U1.CN7_17 U1.CN7_18 U1.CN7_19 U1.CN7_20 U1.CN8_1 U1.CN8_3 U1.CN8_5 U1.CN8_7 U1.CN9_1 U1.CN9_2 U1.CN9_3 U1.CN9_4 U1.CN9_5 U1.CN9_6 U1.CN9_7 U1.CN9_8 U1.CN9_9 U1.CN9_10 U1.CN9_11 U1.CN9_13 U1.CN9_14 U1.CN9_15 U1.CN9_16 U1.CN9_17 U1.CN9_18 U1.CN9_19 U1.CN9_20 U1.CN9_21 U1.CN9_22 U1.CN9_25 U1.CN9_27 U1.CN9_29 U1.CN10_1 U1.CN10_2 U1.CN10_3 U1.CN10_4 U1.CN10_6 U1.CN10_8 U1.CN10_10 U1.CN10_11 U1.CN10_12 U1.CN10_13 U1.CN10_14 U1.CN10_15 U1.CN10_16 U1.CN10_18 U1.CN10_19 U1.CN10_20 U1.CN10_21 U1.CN10_23 U1.CN10_24 U1.CN10_25 U1.CN10_26 U1.CN10_28 U1.CN10_29 U1.CN10_30 U1.CN10_31 U1.CN10_32 U1.CN10_33 U1.CN10_34 XW1.3 XW1.4 XW2.3 XW2.4 XW3.3 XW3.4 XW4.3 XW4.4 XW5.3 XW5.4 XW6.3 XW6.4 XW7.3 XW7.4 XW8.3 XW8.4

## Polygon pours and split planes (outlines as drawn)
BNC_A_GND on Bottom Layer "A_GND_BOT" (solid, remove dead copper, pour order 3): 82,169 228,169 228,0 82,0
GND on Bottom Layer "D_GND_BOT" (solid, remove dead copper, pour order 0): 0,169 81,169 81,0 0,0
BNC_A_GND on Top Layer "A_GND_TOP" (solid, remove dead copper, pour order 2): 82,169 228,169 228,0 82,0
GND on Top Layer "D_GND_TOP" (solid, remove dead copper, pour order 1): 0,169 81,169 81,0 0,0

## Keep-outs
Keep-Out Layer:
  circle w0.25: c76,153.5 r3.5
  circle w0.25: c152,153.5 r3.5
  circle w0.25: c114,84.5 r3.5
  circle w0.25: c152,15.5 r3.5
  circle w0.25: c76,15.5 r3.5

## Silkscreen, mask and mechanical layers (free items; w line width, h text height)
Top Overlay:
  text "MISIS_LUWBS_Switch_System_PCB_v2.0" at 2,163.874 h5
  text "IN_AN" at 83.888,149.351 h4
  text "IN_AP" at 124,149.351 h4
  text "IN_VN" at 163.92,149.351 h4
  text "IN_VP" at 203.92,149.351 h4
  text "ST-Link" at 31,27 h4
  text "OUT_A" at 91.428,17.891 h4
  text "OUT_B" at 131.428,17.891 h4
  text "OUT_C" at 171.428,17.891 h4
  text "OUT_D" at 211.428,17.891 h4
Bottom Overlay:
  text "VIN" at 5.746,80.304 h1.52
  text "5V" at 5.25,65.254 h1.52
Board Outline:
  the board outline again, w0.25

## Dimensions
228,169 to 228,0 on Board Dimensions
0,169 to 228,169 on Board Dimensions